# Altium PCB AD转化量化器.PcbDoc
Units mil, origin at the board's own origin, x right, y up, seen from the top; angles counter-clockwise.
Board outline 6000 x 4000 mil, 2 copper layers (Top Layer, Bottom Layer); 32 components, 30 nets, 91 pads, 0 vias.
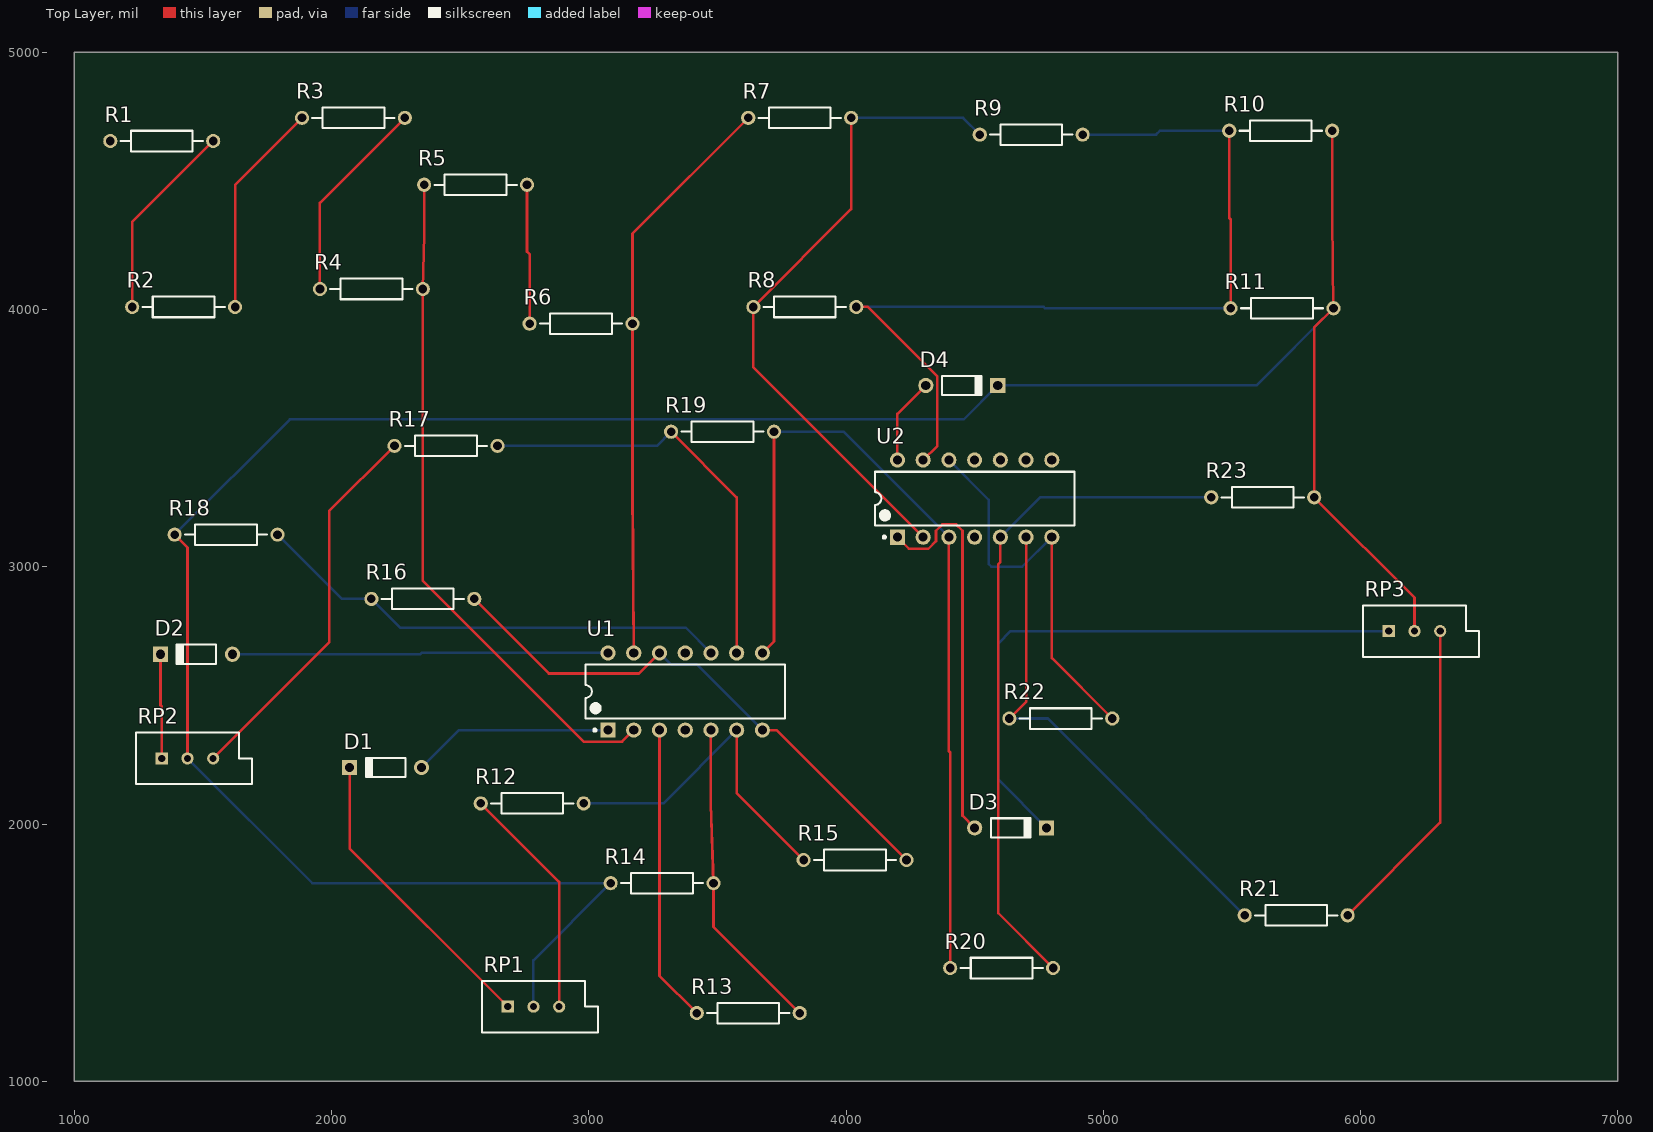
[diagram p0: Top Layer view]
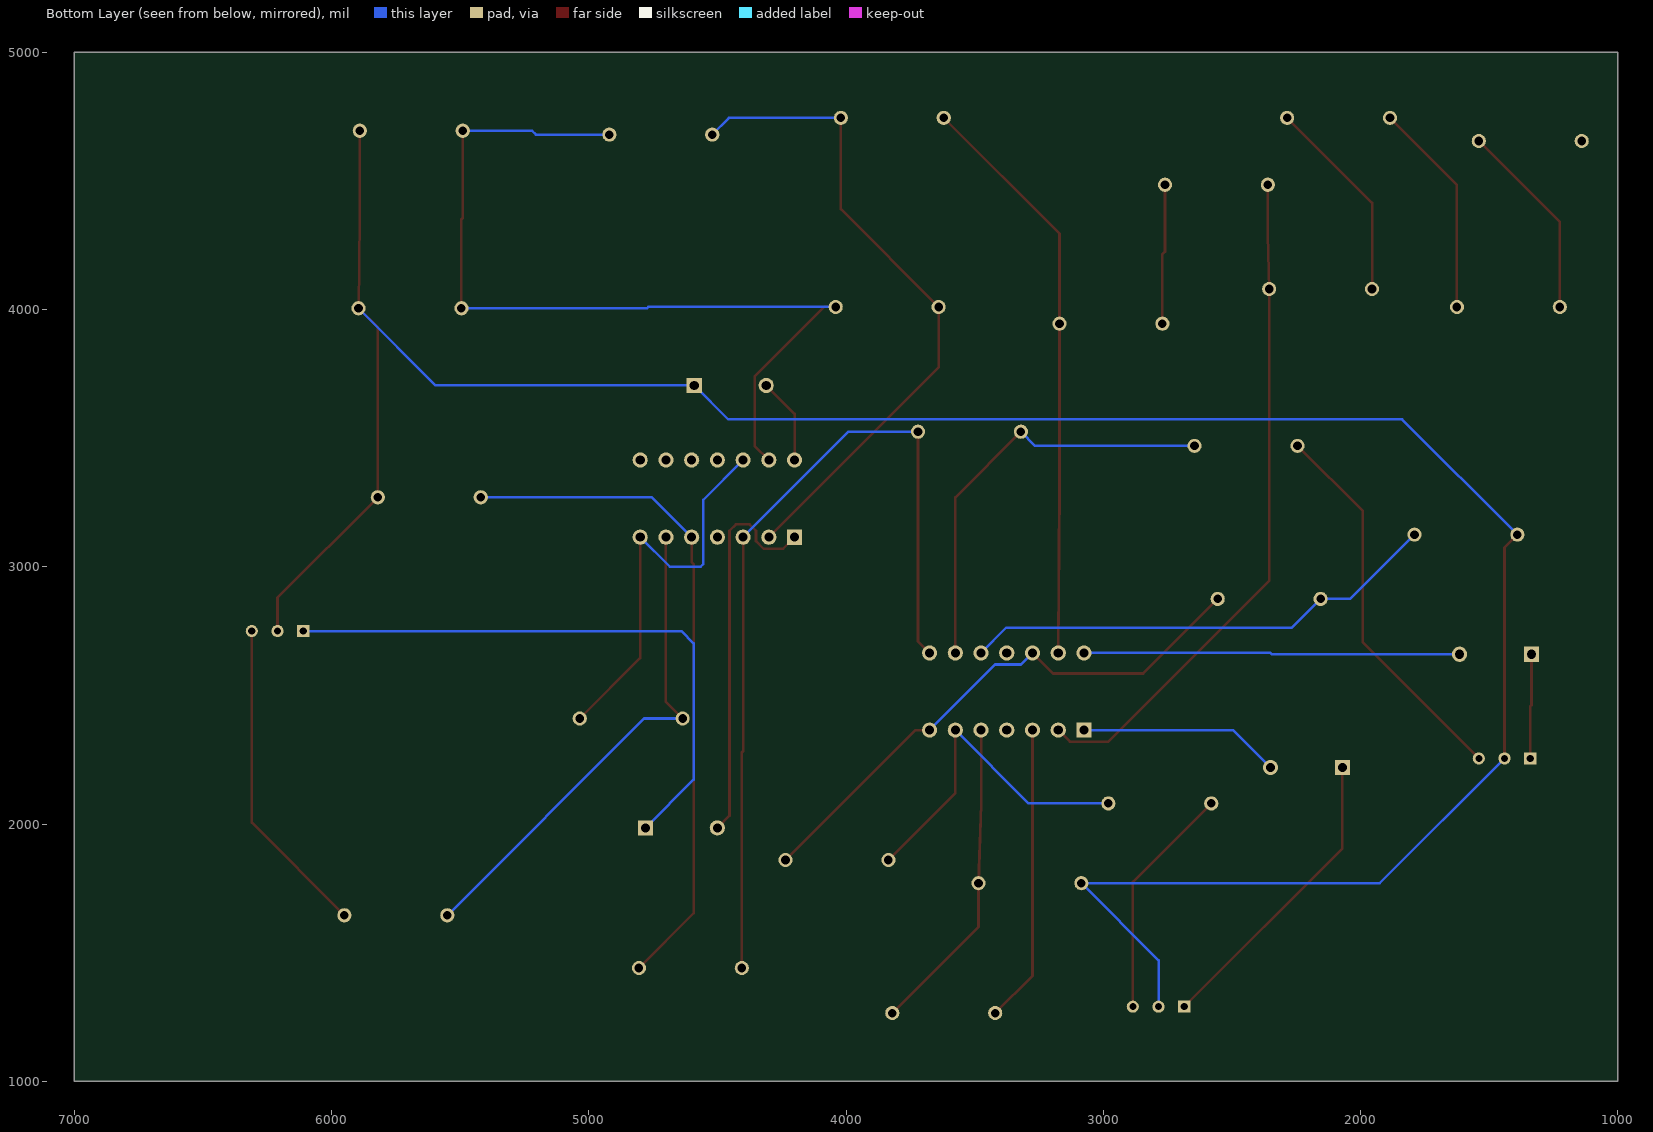
[diagram p1: Bottom Layer view, seen from below]

## Layer stack, top to bottom
Top Solder: solder mask 0.4, Solder Resist, Dk 3.5
Top Layer: signal copper 1.4
Dielectric 1: dielectric 12.6, FR-4, Dk 4.8
Bottom Layer: signal copper 1.4
Bottom Solder: solder mask 0.4, Solder Resist, Dk 3.5

## Board outline
1000,1000 7000,1000 7000,5000 1000,5000

## Design rules (kind name [scope] priority, off if disabled: settings)
Clearance [All] p1: gap=10
PolygonConnect [All] p1: connectstyle=Relief reliefconductorwidth=10 reliefentries=4 polygonreliefangle="90 Angle" airgapwidth=10
RoutingVias [All] p1: holewidth=28 width=50 viastyle="Through Hole" minholewidth=28 minwidth=50 maxholewidth=28 maxwidth=50
SolderMaskExpansion [All] p1: expansion=4
Width [All] p1: maxlimit=10 minlimit=10 preferedwidth=10
29 further rules are at their usual default settings.

## Components (designator, comment, footprint, x,y, rotation, side; value= is the part's Value field where it differs from the comment)
D1 "Diode 1N914" DO-35 2210,2220 r180 top
D2 "Diode 1N914" DO-35 1475,2660 r180 top
D3 "Diode 1N914" DO-35 4640,1985 r0 top
D4 "Diode 1N914" DO-35 4450,3705 r0 top
R1 "Res2" AXIAL-0.4 1340,4655 r0 top
R2 "Res2" AXIAL-0.4 1425,4010 r0 top
R3 "Res2" AXIAL-0.4 2085,4745 r0 top
R4 "Res2" AXIAL-0.4 2155,4080 r0 top
R5 "Res2" AXIAL-0.4 2560,4485 r0 top
R6 "Res2" AXIAL-0.4 2970,3945 r0 top
R7 "Res2" AXIAL-0.4 3820,4745 r0 top
R8 "Res2" AXIAL-0.4 3840,4010 r0 top
R9 "Res2" AXIAL-0.4 4720,4680 r0 top
R10 "Res2" AXIAL-0.4 5690,4695 r0 top
R11 "Res2" AXIAL-0.4 5695,4005 r0 top
R12 "Res2" AXIAL-0.4 2780,2080 r0 top
R13 "Res2" AXIAL-0.4 3620,1265 r0 top
R14 "Res2" AXIAL-0.4 3285,1770 r180 top
R15 "Res2" AXIAL-0.4 4035,1860 r180 top
R16 "Res2" AXIAL-0.4 2355,2875 r0 top
R17 "Res2" AXIAL-0.4 2445,3470 r180 top
R18 "Res2" AXIAL-0.4 1590,3125 r0 top
R19 "Res2" AXIAL-0.4 3520,3525 r0 top
R20 "Res2" AXIAL-0.4 4605,1440 r0 top
R21 "Res2" AXIAL-0.4 5750,1645 r180 top
R22 "Res2" AXIAL-0.4 4835,2410 r0 top
R23 "Res2" AXIAL-0.4 5620,3270 r0 top
RP1 "RPot" VR5 2785,1290 r0 top
RP2 "RPot" VR5 1440,2255 r0 top
RP3 "RPot" VR5 6210,2750 r0 top
U1 "LM324AN" N14A 3375,2515 r90 top
U2 "LM324AN" N14A 4500,3265 r90 top

## Footprints (in the part's own frame and the unit in brackets; to place one, negate y for a bottom-side part, rotate by r counter-clockwise, add the part's x,y. Pads: shape width x height; smd on the part's side, far side on the other; paste and mask are expansions set on the pad)
AXIAL-0.4 [mm] "Axial Device, Thru-Hole; 2 Leads; 0.4 in Pin Spacing"
  round 1.4 hole 0.85: 1(-5.08,0) 2(5.08,0)
  silkscreen extent -4.06,-1.02 4.06,1.02
DO-35 [mm] "Diode, Axial; Body 3.8 x 1.9 mm (LxDia. max), Lead Dia. 0.53 mm (max)"
  round 1.5 hole 0.9: 1(-3.55,0)
  rect 1.5x1.5 hole 0.9: 2(3.55,0)
  silkscreen extent -1.95,-0.95 2.05,0.95
N14A [mm] "DIP, 14-Leads, Row Spacing 7.62mm, Pitch 2.54mm, Body 19.56x6.35mm"
  rect 1.5x1.5 hole 0.9: 1(-3.81,7.62)
  round 1.5 hole 0.9: 2(-3.81,5.08) 3(-3.81,2.54) 4(-3.81,0) 5(-3.81,-2.54) 6(-3.81,-5.08) 7(-3.81,-7.62) 8(3.81,-7.62) 9(3.81,-5.08) 10(3.81,-2.54) 11(3.81,0) 12(3.81,2.54) 13(3.81,5.08) 14(3.81,7.62)
  silkscreen extent -3.93,-9.85 2.65,9.85, body extent -3.55,-9.85 3.55,9.85, height 5.08
VR5 [mm] "Thru-Hole; 3 Leads"
  rect 1.2x1.2 hole 0.7: 1(-2.54,0)
  round 1.2 hole 0.7: 2(0,0) 3(2.54,0)
  silkscreen extent -5.08,-2.54 6.35,2.54

## Part data
D1 D2 D3 D4: "High Conductance Fast Diode"
R1 R2 R3 R4 R5 R6 R7 R8 R9 R10 R11 R12 R13 R14 R15 R16 R17 R18 R19 R20 R21 R22 R23: "Resistor"
RP1 RP2 RP3: "Potentiometer"
U1 U2: "Low Power Quad Operational Amplifier, 14-pin MDIP"

## Nets (pads, with @x,y where several pads share a name; then routed paths per layer and width w, separated by ;. In a path a pad name is that pad's centre, name@x,y a point inside that pad or via, vN(x,y) a via of type N, cw(c..) or ccw(c..) an arc to the next point about the centre after c; other vN are vias at no path point)
GND: D4.2 R10.2 R11.2 R14.2 R18.1 R23.2 RP1.2 RP2.2 RP3.2 | length 10348
  Top Layer w10: R18.1 1440,3075 RP2.2 ; R10.2 5890,4355 R11.2 5820,3930 R23.2 6210,2880 RP3.2
  Bottom Layer w10: R18.1 1838,3573 4457.76,3573 D4.2 5595,3705 R11.2 ; RP2.2 1925,1770 R14.2 2785,1470 RP1.2
NetD1_1: D1.1 U1.1 | length 785.3
  Bottom Layer w10: D1.1 2494.76,2365 U1.1
NetD1_2: D1.2 RP1.1 | length 1184.6
  Top Layer w10: D1.2 2070.24,1904.76 RP1.1
NetD2_1: D2.1 U1.14 | length 1462.3
  Bottom Layer w10: D2.1 2345,2660 2350,2665 U1.14
NetD2_2: D2.2 RP2.1 | length 407
  Top Layer w10: D2.2 1335.24,2461.76 1340,2457 RP2.1
NetD3_1: D3.1 U2.1 | length 1519.3
  Top Layer w10: U2.1 4245,3070 4320,3070 4350,3100 4350,3140 4375,3165 4428,3165 4453,3140 4453,2032.24 D3.1
NetD3_2: D3.2 RP3.1 | length 2332.7
  Bottom Layer w10: D3.2 4592,2172.76 4592,2702 4640,2750 RP3.1
NetD4_1: D4.1 U2.14 | length 335.7
  Top Layer w10: U2.14 4200,3594.76 D4.1
NetR1_2: R1.2 R2.1 | length 775.5
  Top Layer w10: R2.1 1225,4340 R1.2
NetR2_2: R2.2 R3.1 | length 842.7
  Top Layer w10: R2.2 1625,4485 R3.1
NetR3_2: R3.2 R4.1 | length 801.7
  Top Layer w10: R4.1 1955,4415 R3.2
NetR4_2: R4.2 R5.1 U1.2 | length 2637.6
  Top Layer w10: R5.1 2360,4288 R4.2 2355,2945 2980,2320 3130,2320 U1.2
NetR5_2: R5.2 R6.1 | length 544.1
  Top Layer w10: R5.2 2760,4225 2770,4215 R6.1
NetR6_2: R6.2 R7.1 U1.13 | length 2266.4
  Top Layer w10: U1.13 3170,3310 R6.2 3170,4295 R7.1
NetR7_2: R7.2 R8.1 R9.1 U2.2 | length 2587.7
  Top Layer w10: R7.2 4020,4390 R8.1 3640,3775 U2.2
  Bottom Layer w10: R7.2 4455,4745 R9.1
NetR8_2: R8.2 R9.2 R10.1 R11.1 U2.13 | length 3500
  Top Layer w10: R8.2 4085,4010 4355,3740 4355,3470 U2.13 ; R10.1 5490,4355 5495,4350 R11.1
  Bottom Layer w10: R8.2 4768,4010 4773,4005 R11.1 ; R9.2 5205,4680 5220,4695 R10.1
NetR12_1: R12.1 RP1.3 | length 916.3
  Top Layer w10: R12.1 2885,1775 RP1.3
NetR12_2: R12.2 R15.2 U1.6 | length 1325.7
  Top Layer w10: U1.6 3575,2120 R15.2
  Bottom Layer w10: R12.2 3290,2080 U1.6
NetR13_2: R13.2 R14.1 U1.5 | length 1238.9
  Top Layer w10: U1.5 3475,2078 R14.1 3485,1600 R13.2
NetR15_1: R15.1 R16.2 U1.7 U1.12 | length 2166.7
  Top Layer w10: R16.2 2845,2585 3195,2585 U1.12 ; U1.7 3730,2365 R15.1
  Bottom Layer w10: U1.12 3320,2620 3420,2620 U1.7
NetR16_1: R16.1 R18.2 U1.10 | length 1875.5
  Bottom Layer w10: R18.2 2040,2875 R16.1 2267,2763 3377,2763 U1.10
NetR17_1: R17.1 R19.1 U1.9 | length 1663.4
  Top Layer w10: R19.1 3575,3270 U1.9
  Bottom Layer w10: R17.1 3265,3470 R19.1
NetR17_2: R17.2 RP2.3 | length 1507
  Top Layer w10: RP2.3 1991,2706 1991,3216 R17.2
NetR19_2: R19.2 R20.1 U1.8 U2.3 | length 3405.5
  Top Layer w10: U1.8 3720,2710 R19.2 ; U2.3 4400,2283 4405,2278 R20.1
  Bottom Layer w10: R19.2 3990,3525 U2.3
NetR20_2: R20.2 R23.1 U2.5 | length 2650.7
  Top Layer w10: U2.5 4600,3018 4592,3010 4592,1653 R20.2
  Bottom Layer w10: U2.5 4755,3270 R23.1
NetR21_1: R21.1 RP3.3 | length 1254.1
  Top Layer w10: R21.1 6310,2005 RP3.3
NetR21_2: R21.2 R22.1 U2.6 | length 1963.8
  Top Layer w10: R22.1 4700,2475 U2.6
  Bottom Layer w10: R22.1 4785,2410 R21.2
NetR22_2: R22.2 U2.7 U2.12 | length 1568.3
  Top Layer w10: U2.7 4800,2645 R22.2
  Bottom Layer w10: U2.12 4555,3260 4555,3010 4565,3000 4685,3000 U2.7
VCC: R1.1
VI: R13.1 U1.3 | length 1160.1
  Top Layer w10: U1.3 3275,1410 R13.1
pads on no net: U1.4 U1.11 U2.4 U2.8 U2.9 U2.10 U2.11